# Altium PCB EZ_FPGA_Bridge.PcbDoc (part 1 of 2)
Units mil, origin at the board's own origin, x right, y up, seen from the top; angles counter-clockwise.
Board outline 3937 x 3150 mil, 2 copper layers (Top Layer, Bottom Layer); 28 components, 69 nets, 313 pads, 1452 vias.
Unrouted connection lines stored in the file: 1.
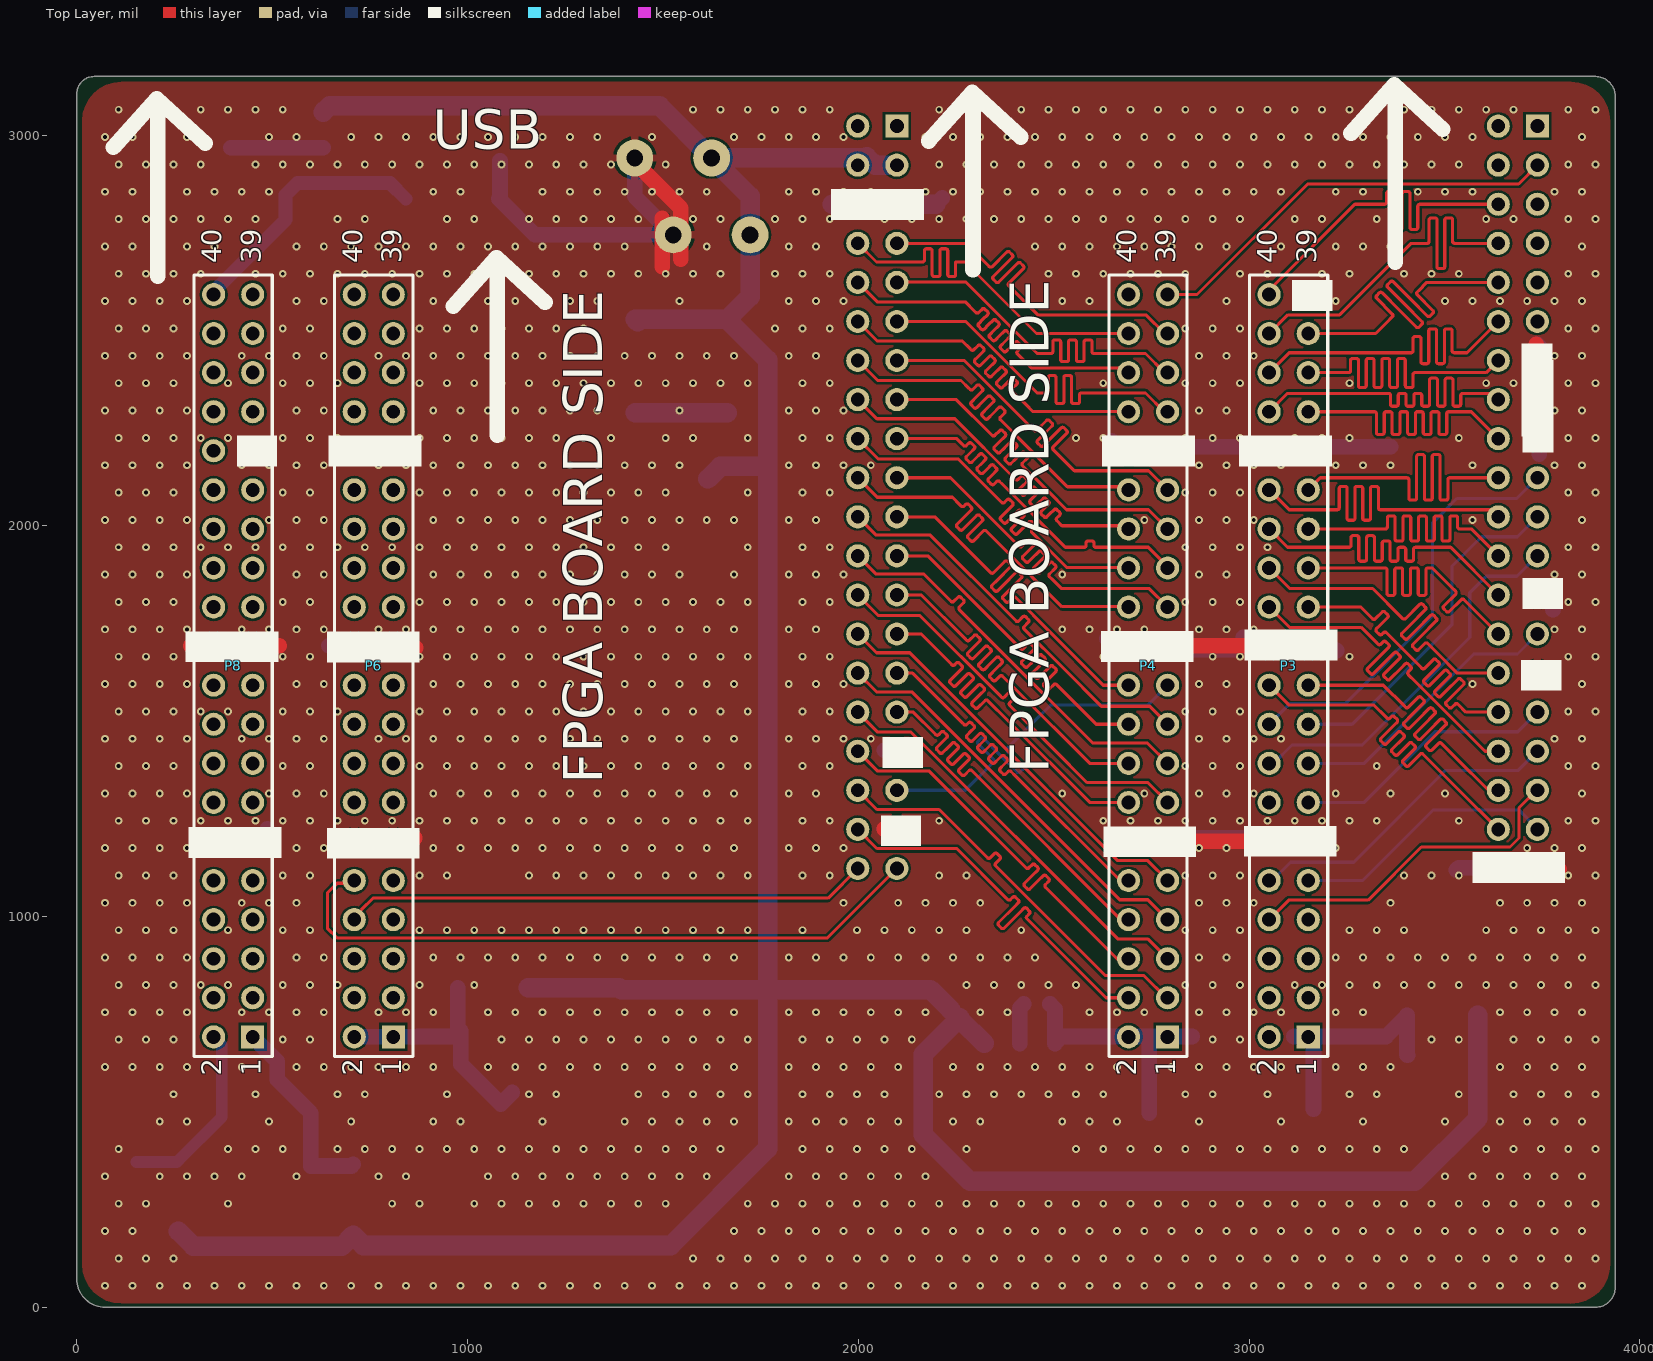
[diagram p0: Top Layer view]
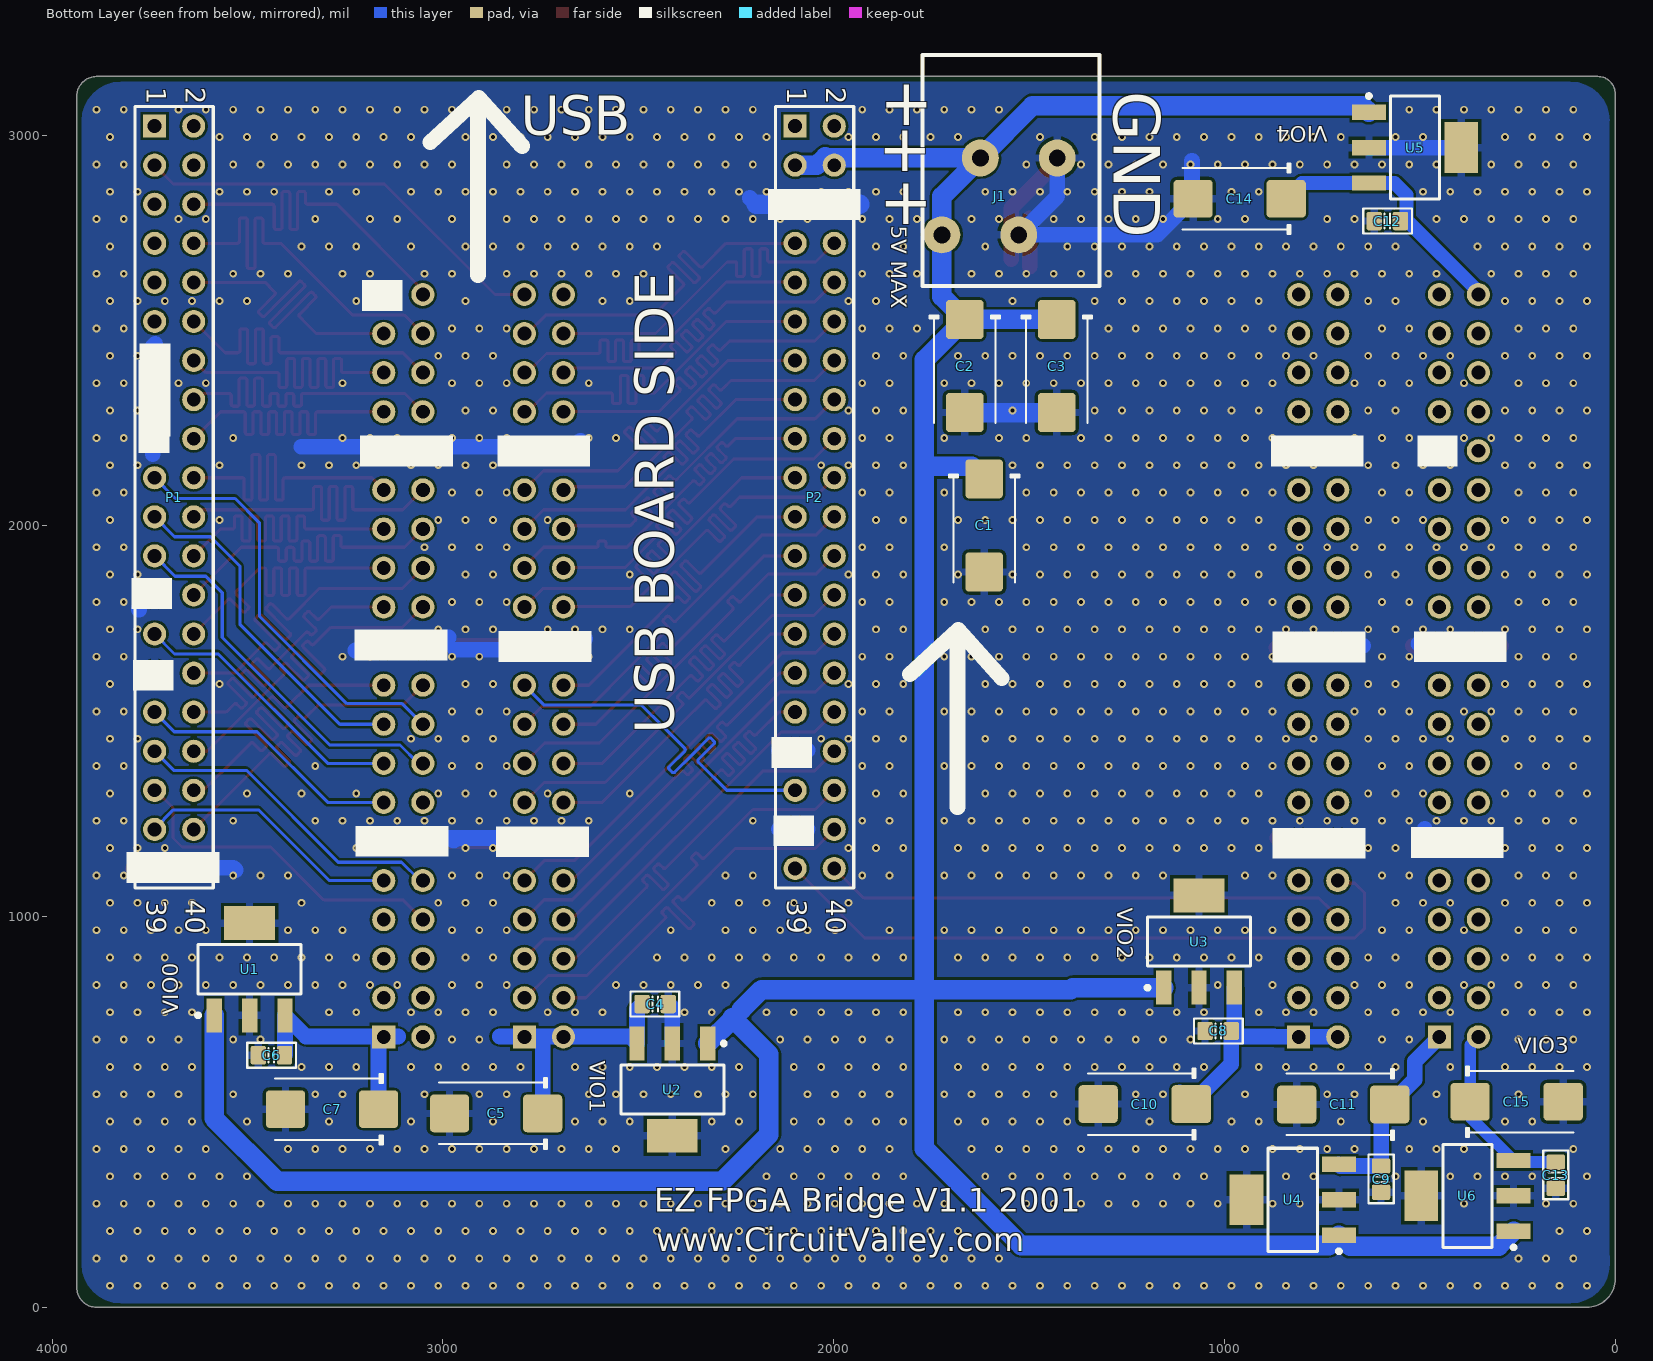
[diagram p1: Bottom Layer view, seen from below]
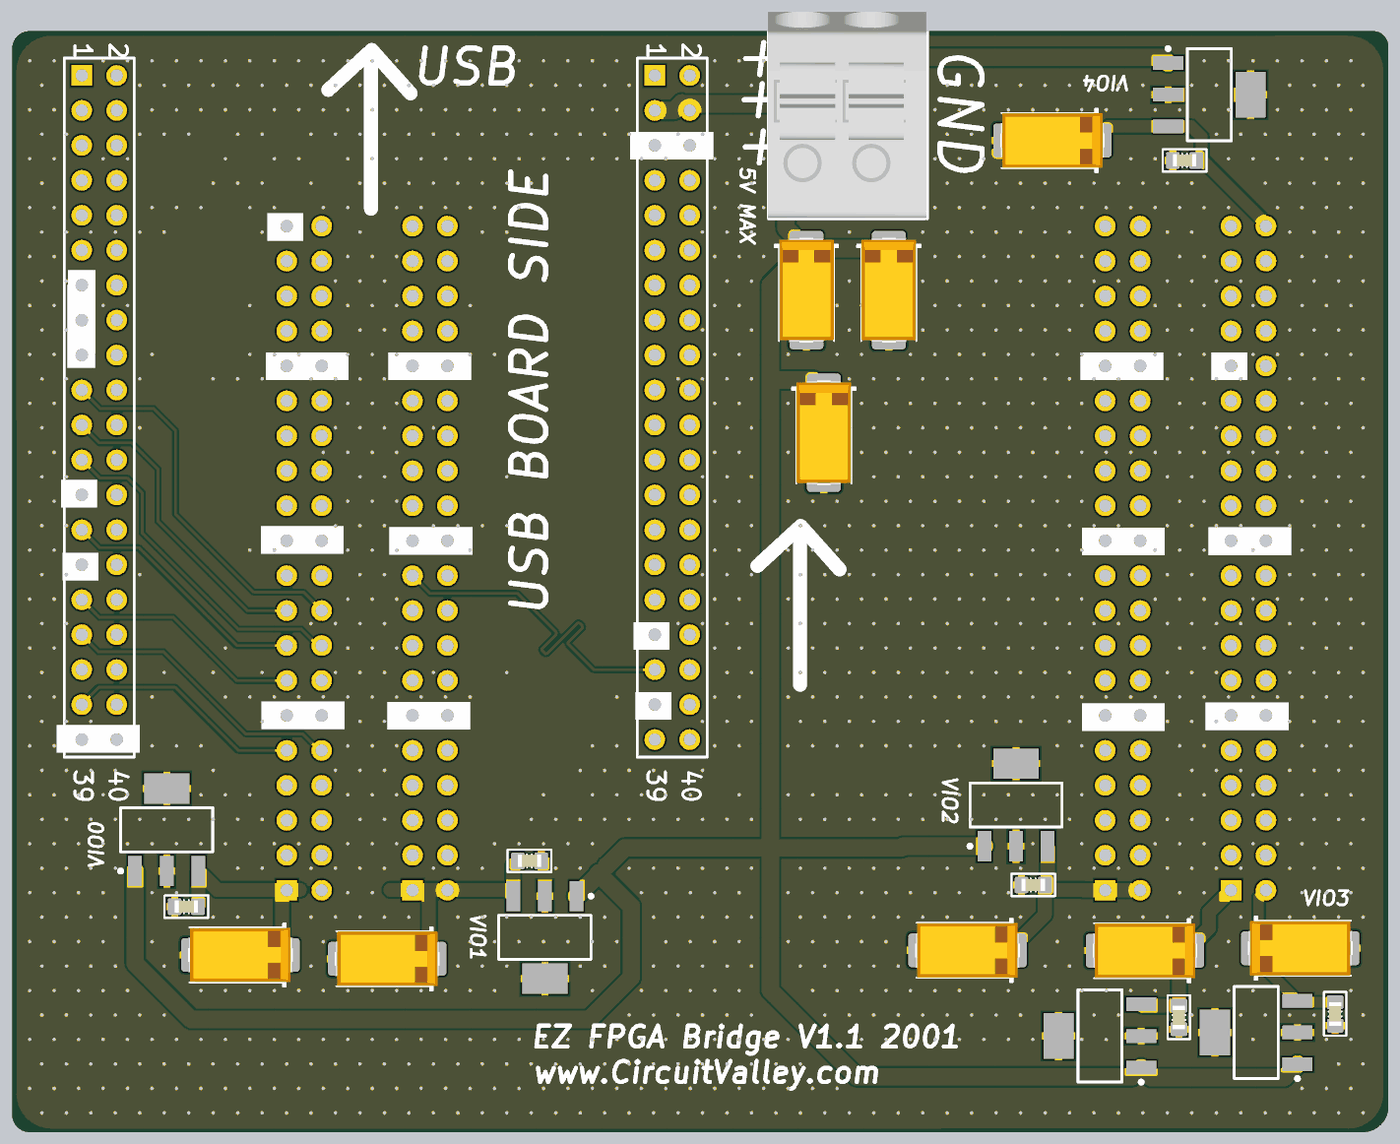
[diagram p3: 3D render of the assembled board from below, using the file's embedded part models]

## Layer stack, top to bottom
Top Solder: solder mask 0.4, Solder Resist, Dk 3.5
Top Layer: signal copper 1.4
Dielectric 1: dielectric 12.6, FR-4, Dk 4.8
Bottom Layer: signal copper 1.4
Bottom Solder: solder mask 0.4, Solder Resist, Dk 3.5

## Board outline
0,72 0,3106 cw(c44,3106) 44,3150 3887,3150 cw(c3887,3100) 3937,3100 3937,50 cw(c3887,50) 3887,0 72,0 cw(c72,72)

## Design rules (kind name [scope] priority, off if disabled: settings)
Clearance [All] p1: gap=6
MatchedLengths EZ_USB [InNetClass('EZ_USB')] p1: tolerance=2 checknetsindiffpair=TRUE checkdiffpairvsdiffpair=TRUE checkothers=TRUE
PolygonConnect [All] p1: connectstyle=Relief reliefconductorwidth=20 reliefentries=4 polygonreliefangle="90 Angle" airgapwidth=8
RoutingVias [All] p1: holewidth=11.81 width=24 viastyle="Through Hole" minholewidth=11.81 minwidth=24 maxholewidth=196.85 maxwidth=250
SolderMaskExpansion [All] p1: expansion=4
Width [All] p1: maxlimit=500 minlimit=6 preferedwidth=10
30 further rules are at their usual default settings.

## Classes and differential pairs
net class EZ_USB: CTL0 CTL1 CTL2 CTL3 CTL4_SW CTL5 CTL6 CTL7 CTL8 CTL9 CTL10 CTL11 CTL12 DQ0 DQ1 DQ2 DQ3 DQ4 DQ5 DQ6 DQ7 DQ8 DQ9 DQ10 DQ11 DQ12 DQ13 DQ14 DQ15 DQ16 DQ17 DQ18 DQ19 DQ20 DQ21 DQ22 DQ23 DQ24 DQ25 DQ26 DQ27 DQ28 DQ29 DQ30 DQ31 GPIO45 PCLK

## Components (designator, comment, footprint, x,y, rotation, side; value= is the part's Value field where it differs from the comment)
C1 "33uf 20V D" CAPMP7343X310N 1615,2001 r270 bottom
C2 "33uf 20V D" CAPMP7343X310N 1664.5,2409 r270 bottom
C3 "33uf 20V D" CAPMP7343X310N 1429,2409 r270 bottom
C4 "100n" CAPC1608N 2457,776 r0 bottom
C5 "33uf 20V D" CAPMP7343X310N 2864,496 r0 bottom
C6 "100n" CAPC1608N 3439,645 r180 bottom
C7 "33uf 20V D" CAPMP7343X310N 3284,507 r0 bottom
C8 "100n" CAPC1608N 1016,707 r180 bottom
C9 "100n" CAPC1608N 599,328 r90 bottom
C10 "33uf 20V D" CAPMP7343X310N 1204,520 r0 bottom
C11 "33uf 20V D" CAPMP7343X310N 696,519 r0 bottom
C12 "100n" CAPC1608N 583,2780 r180 bottom
C13 "100n" CAPC1608N 152,338 r90 bottom
C14 "33uf 20V D" CAPMP7343X310N 961,2837 r0 bottom
C15 "33uf 20V D" CAPMP7343X310N 252,526 r180 bottom
J1 "804-102" 804-102 1546,2910 r0 bottom
P1 "Header 20X2" HDR2X20 3738,3023 r270 bottom
P2 "Header 20X2" HDR2X20 2098.63,3023 r270 bottom
P3 "Header 20X2" HDR2X20 3151.57,692 r90 top
P4 "Header 20X2" HDR2X20 2791.73,692 r90 top
P6 "Header 20X2" HDR2X20 809.84,692 r90 top
P8 "Header 20X2" HDR2X20 450,692 r90 top
U1 "MCP1826ST-1802E/DB" SOT-223-DB3_N 3495,865 r90 bottom
U2 "MCP1826ST-1802E/DB" SOT-223-DB3_N 2413,557 r270 bottom
U3 "MCP1826ST-1802E/DB" SOT-223-DB3_N 1065,936 r90 bottom
U4 "MCP1826ST-1802E/DB" SOT-223-DB3_N 825,275 r0 bottom
U5 "MCP1826ST-1802E/DB" SOT-223-DB3_N 512,2968 r180 bottom
U6 "MCP1826ST-1802E/DB" SOT-223-DB3_N 378,285 r0 bottom

## Footprints (in the part's own frame and the unit in brackets; to place one, negate y for a bottom-side part, rotate by r counter-clockwise, add the part's x,y. Pads: shape width x height; smd on the part's side, far side on the other; paste and mask are expansions set on the pad)
804-102 [mm] "Wago"
  round 2.4 hole 1.1: 1(-3,-0.8) 1(-0.5,4.2) 2(2,-0.8) 2(4.5,4.2)
  silkscreen extent -5.75,-7.5 5.75,7.52, body extent -5.69,-7.51 5.81,7.49, height 14.41
CAPC1608N [mm] "Chip Capacitor, Body 1.6x0.8mm, 0603, IPC Medium Density"
  round 0.254 on Mech14: 0(0,0)
  rrect25% 1x1.2 smd: 1(-0.85,0) 2(0.85,0)
  Top Layer pour cut-out: -0.4,0.6 0.4,0.6 0.4,-0.6 -0.4,-0.6
  silkscreen extent -1.57,-0.81 1.6,0.81, body extent -0.85,-0.45 0.85,0.45, height 0.89
CAPMP7343X310N [mm] "Molded body capacitor, Body 7.3x4.3mm, 2917, IPC Nominal settings"
  round 1 on Mech14: 0(0,0)
  rrect20% 2.55x2.45 smd: 1(-3.025,0) 2(3.025,0)
  silkscreen extent -3.3,-2.3 3.7,2.3, body extent -3.8,-1.97 3.8,1.98, height 3.1
HDR2X20 [mm] "Connector; Header; 20x2 Position"
  rect 1.5x1.5 hole 0.9: 1(0,0)
  round 1.5 hole 0.9: 2(0,2.54) 3(2.54,0) 4(2.54,2.54) 5(5.08,0) 6(5.08,2.54) 7(7.62,0) 8(7.62,2.54) 9(10.16,0) 10(10.16,2.54) 11(12.7,0) 12(12.7,2.54) 13(15.24,0) 14(15.24,2.54) 15(17.78,0) 16(17.78,2.54) 17(20.32,0) 18(20.32,2.54) 19(22.86,0) 20(22.86,2.54) 21(25.4,0) 22(25.4,2.54) 23(27.94,0) 24(27.94,2.54) 25(30.48,0) 26(30.48,2.54) 27(33.02,0) 28(33.02,2.54) 29(35.56,0) 30(35.56,2.54) 31(38.1,0) 32(38.1,2.54) 33(40.64,0) 34(40.64,2.54) 35(43.18,0) 36(43.18,2.54) 37(45.72,0) 38(45.72,2.54) 39(48.26,0) 40(48.26,2.54)
  silkscreen extent -1.27,-1.27 49.53,3.81
SOT-223-DB3_N [mm] "SOT223, 4-Leads, Body 6.5x3.5mm, Pitch 2.3mm, Lead Span 7mm, IPC Medium Density"
  rect 2.2x1 smd: 1(-3,2.3) 2(-3,0) 3(-3,-2.3)
  rect 2.2x3.3 smd: 4(3,0)
  silkscreen extent -3.12,-3.35 1.6,3.48, body extent -1.85,-3.35 1.85,3.35, height 1.8

## Part data
C1 C2 C3 C5 C7 C10 C11 C14 C15: library part CAPT_330u_2917_6V3, "Capacitor SMD Tant 330uF 20% 6V3 2917"
C4 C6 C8 C9 C12 C13: library part CAPC_10p_0603_NP0_1%_50V, "Capacitor SMD Cer 10pF 5% 50V NP0 0603"
P1 P2 P3 P4 P6 P8: "Header, 20-Pin, Dual row"
U1 U2 U3 U4 U5 U6: "1000 mA, Low Voltage, Low Quiescent Current LDO Regulator, 3-Pin SOT-223, Extended Temperature, Tape and Reel"

## Via types
v1: diameter 20, hole 10, Top Layer to Bottom Layer, tented both sides, 1452 vias

## Nets (pads, with @x,y where several pads share a name; then routed paths per layer and width w, separated by ;. In a path a pad name is that pad's centre, name@x,y a point inside that pad or via, vN(x,y) a via of type N, cw(c..) or ccw(c..) an arc to the next point about the centre after c; other vN are vias at no path point)
CTL0: P2.31 P4.8 | length 1054.5
  Top Layer w8: P2.31@2098.63,1523 2141,1523 2195,1469 2198.54,1465.46 ccw(c2202.07,1469) 2205.61,1465.46 2212.28,1472.14 cw(c2215.82,1468.6) 2219.35,1472.14 2226.42,1465.07 cw(c2222.89,1461.53) 2226.42,1458 2216.21,1447.79 2201.5,1433.08 ccw(c2205.04,1429.54) 2201.5,1426.01 2208.57,1418.93 ccw(c2212.11,1422.47) 2215.64,1418.93 2230.36,1433.64 2240.57,1443.86 cw(c2244.1,1440.32) 2247.64,1443.86 2254.71,1436.78 cw(c2251.17,1433.25) 2254.71,1429.71 2244.5,1419.5 2229.79,1404.79 ccw(c2233.32,1401.26) 2229.79,1397.72 2236.86,1390.65 ccw(c2240.39,1394.18) 2243.93,1390.65 2258.64,1405.36 2268.85,1415.57 cw(c2272.39,1412.04) 2275.92,1415.57 2282.99,1408.5 cw(c2279.46,1404.96) 2282.99,1401.43 2272.78,1391.22 2258.07,1376.51 ccw(c2261.61,1372.97) 2258.07,1369.44 2265.14,1362.36 ccw(c2268.68,1365.9) 2272.21,1362.36 2283.39,1373.54 cw(c2286.92,1370) 2290.46,1373.54 2306.5,1357.5 2672,992 P4.8@2691.73,992
CTL1: P2.29 P4.10 | length 1054.5
  Top Layer w8: P2.29@2098.63,1623 2139,1623 2267,1495 2270.54,1491.46 ccw(c2274.07,1495) 2277.61,1491.46 2281.85,1495.71 cw(c2285.38,1492.17) 2288.92,1495.71 2295.99,1488.64 cw(c2292.46,1485.1) 2295.99,1481.56 2288.21,1473.79 2278.31,1463.88 ccw(c2281.84,1460.35) 2278.31,1456.81 2285.38,1449.74 ccw(c2288.92,1453.28) 2292.45,1449.74 2302.36,1459.64 2310.13,1467.42 cw(c2313.67,1463.89) 2317.2,1467.42 2324.28,1460.35 cw(c2320.74,1456.82) 2324.28,1453.28 2316.5,1445.5 2306.59,1435.6 ccw(c2310.13,1432.06) 2306.59,1428.53 2313.66,1421.46 ccw(c2317.2,1424.99) 2320.74,1421.46 2330.64,1431.36 2338.42,1439.14 cw(c2341.95,1435.6) 2345.49,1439.14 2352.56,1432.07 cw(c2349.02,1428.53) 2352.56,1425 2344.78,1417.22 2334.88,1407.31 ccw(c2338.41,1403.78) 2334.88,1400.24 2341.95,1393.17 ccw(c2345.48,1396.71) 2349.02,1393.17 2358.92,1403.08 2366.7,1410.85 cw(c2370.24,1407.32) 2373.77,1410.85 2380.84,1403.78 cw(c2377.31,1400.25) 2380.84,1396.71 2373.07,1388.93 2363.16,1379.03 ccw(c2366.7,1375.49) 2363.16,1371.96 2370.23,1364.89 ccw(c2373.77,1368.42) 2377.3,1364.89 2383.67,1371.26 cw(c2387.21,1367.72) 2390.74,1371.26 2401.5,1360.5 2670,1092 P4.10@2691.73,1092
CTL2: P2.27 P4.14 | length 1054.5
  Top Layer w8: P2.27@2098.63,1723 2161,1723 2236,1648 2239.54,1644.46 ccw(c2243.07,1648) 2246.61,1644.46 2250.85,1648.71 cw(c2254.38,1645.17) 2257.92,1648.71 2264.99,1641.64 cw(c2261.46,1638.1) 2264.99,1634.57 2257.21,1626.79 2235.19,1604.76 ccw(c2238.72,1601.23) 2235.19,1597.69 2242.26,1590.62 ccw(c2245.79,1594.16) 2249.33,1590.62 2271.36,1612.64 2279.13,1620.42 cw(c2282.67,1616.89) 2286.2,1620.42 2293.28,1613.35 cw(c2289.74,1609.82) 2293.28,1606.28 2285.5,1598.5 2263.47,1576.48 ccw(c2267.01,1572.94) 2263.47,1569.41 2270.54,1562.34 ccw(c2274.08,1565.87) 2277.61,1562.34 2299.64,1584.36 2307.42,1592.14 cw(c2310.95,1588.6) 2314.49,1592.14 2321.56,1585.07 cw(c2318.02,1581.53) 2321.56,1578 2313.78,1570.22 2291.76,1548.19 ccw(c2295.29,1544.66) 2291.76,1541.12 2298.83,1534.05 ccw(c2302.36,1537.59) 2305.9,1534.05 2324.39,1552.54 cw(c2327.92,1549) 2331.46,1552.54 2382,1502 2592,1292 P4.14@2691.73,1292
CTL3: P2.25 P4.16 | length 1054.5
  Top Layer w8: P2.25@2098.63,1823 2161,1823 2273.5,1710.5 2277.04,1706.96 ccw(c2280.57,1710.5) 2284.11,1706.96 2296.47,1719.33 cw(c2300.01,1715.8) 2303.54,1719.33 2310.61,1712.26 cw(c2307.08,1708.72) 2310.61,1705.19 2294.71,1689.29 2280.81,1675.39 ccw(c2284.35,1671.85) 2280.81,1668.31 2287.88,1661.24 ccw(c2291.42,1664.78) 2294.95,1661.24 2308.86,1675.14 2324.76,1691.05 cw(c2328.29,1687.51) 2331.83,1691.05 2338.9,1683.98 cw(c2335.36,1680.44) 2338.9,1676.9 2323,1661 2309.1,1647.1 ccw(c2312.63,1643.57) 2309.1,1640.03 2316.17,1632.96 ccw(c2319.7,1636.49) 2323.24,1632.96 2337.14,1646.86 2353.04,1662.76 cw(c2356.58,1659.23) 2360.11,1662.76 2367.18,1655.69 cw(c2363.65,1652.16) 2367.18,1648.62 2351.28,1632.72 2337.38,1618.82 ccw(c2340.92,1615.28) 2337.38,1611.75 2344.45,1604.67 ccw(c2347.99,1608.21) 2351.52,1604.67 2361.89,1615.04 cw(c2365.42,1611.5) 2368.96,1615.04 2403,1581 2592,1392 P4.16@2691.73,1392
CTL4_SW: P2.23 P4.18 | length 1054.5
  Top Layer w8: P2.23@2098.63,1923 2178,1923 2412,1689 2415.54,1685.46 ccw(c2419.07,1689) 2422.61,1685.46 2434.47,1697.33 cw(c2438.01,1693.79) 2441.54,1697.33 2448.61,1690.26 cw(c2445.08,1686.72) 2448.61,1683.19 2433.21,1667.79 2418.81,1653.39 ccw(c2422.35,1649.85) 2418.81,1646.31 2425.88,1639.24 ccw(c2429.42,1642.78) 2432.95,1639.24 2447.36,1653.64 2462.76,1669.05 cw(c2466.29,1665.51) 2469.83,1669.05 2476.9,1661.98 cw(c2473.36,1658.44) 2476.9,1654.9 2461.5,1639.5 2447.1,1625.1 ccw(c2450.63,1621.57) 2447.1,1618.03 2454.17,1610.96 ccw(c2457.7,1614.49) 2461.24,1610.96 2475.64,1625.36 2491.04,1640.76 cw(c2494.58,1637.23) 2498.11,1640.76 2505.18,1633.69 cw(c2501.65,1630.16) 2505.18,1626.62 2489.78,1611.22 2475.38,1596.82 ccw(c2478.92,1593.28) 2475.38,1589.75 2482.45,1582.67 ccw(c2485.99,1586.21) 2489.52,1582.67 2500.39,1593.54 cw(c2503.92,1590) 2507.46,1593.54 2540,1561 2609,1492 P4.18@2691.73,1492
CTL5: P2.21 P4.20 | length 1054.5
  Top Layer w8: P2.21@2098.63,2023 2196,2023 2335.5,1883.5 2339.04,1879.96 ccw(c2342.57,1883.5) 2346.11,1879.96 2374.93,1908.79 cw(c2378.47,1905.25) 2382,1908.79 2389.07,1901.72 cw(c2385.54,1898.18) 2389.07,1894.65 2356.71,1862.29 2342.35,1847.93 ccw(c2345.89,1844.39) 2342.35,1840.85 2349.42,1833.78 ccw(c2352.96,1837.32) 2356.49,1833.78 2370.86,1848.14 2403.22,1880.51 cw(c2406.75,1876.97) 2410.29,1880.51 2417.36,1873.43 cw(c2413.82,1869.9) 2417.36,1866.36 2385,1834 2370.64,1819.64 ccw(c2374.17,1816.11) 2370.64,1812.57 2377.71,1805.5 ccw(c2381.24,1809.03) 2384.78,1805.5 2395.6,1816.32 cw(c2399.14,1812.79) 2402.68,1816.32 2493,1726 2627,1592 P4.20@2691.73,1592
CTL6: P2.19 P4.23 | length 1054.5
  Top Layer w8: P2.19@2098.63,2123 2236,2123 2408,1951 2411.54,1947.46 ccw(c2415.07,1951) 2418.61,1947.46 2433.46,1962.32 cw(c2436.99,1958.78) 2440.53,1962.32 2447.6,1955.24 cw(c2444.06,1951.71) 2447.6,1948.17 2429.21,1929.79 2421.44,1922.01 ccw(c2424.97,1918.47) 2421.44,1914.94 2428.51,1907.87 ccw(c2432.04,1911.4) 2435.58,1907.87 2443.36,1915.64 2461.74,1934.03 cw(c2465.28,1930.5) 2468.81,1934.03 2475.88,1926.96 cw(c2472.35,1923.42) 2475.88,1919.89 2457.5,1901.5 2449.72,1893.72 ccw(c2453.25,1890.19) 2449.72,1886.65 2456.79,1879.58 ccw(c2460.33,1883.12) 2463.86,1879.58 2471.64,1887.36 2490.03,1905.75 cw(c2493.56,1902.21) 2497.1,1905.75 2504.17,1898.68 cw(c2500.63,1895.14) 2504.17,1891.61 2489.32,1876.75 ccw(c2492.85,1873.22) 2489.32,1869.68 2498.5,1860.5 2519,1840 2743.73,1840 P4.23@2791.73,1792
CTL7: P2.17 P4.25 | length 1054.5
  Top Layer w8: P2.17@2098.63,2223 2252,2223 2266,2209 2269.54,2205.46 ccw(c2273.07,2209) 2276.61,2205.46 2282.53,2211.39 cw(c2286.06,2207.85) 2289.6,2211.39 2296.67,2204.32 cw(c2293.14,2200.78) 2296.67,2197.24 2287.21,2187.79 2276.76,2177.33 ccw(c2280.29,2173.79) 2276.76,2170.26 2283.83,2163.19 ccw(c2287.36,2166.72) 2290.9,2163.19 2301.36,2173.64 2310.81,2183.1 cw(c2314.35,2179.57) 2317.88,2183.1 2324.96,2176.03 cw(c2321.42,2172.5) 2324.96,2168.96 2315.5,2159.5 2305.04,2149.05 ccw(c2308.58,2145.51) 2305.04,2141.97 2312.11,2134.9 ccw(c2315.65,2138.44) 2319.18,2134.9 2329.64,2145.36 2339.1,2154.82 cw(c2342.63,2151.28) 2346.17,2154.82 2353.24,2147.75 cw(c2349.7,2144.21) 2353.24,2140.68 2343.78,2131.22 2333.32,2120.76 ccw(c2336.86,2117.23) 2333.32,2113.69 2340.4,2106.62 ccw(c2343.93,2110.15) 2347.47,2106.62 2354.39,2113.54 cw(c2357.92,2110) 2361.46,2113.54 2369,2106 2530,1945 2573,1945 2578,1945 ccw(c2578,1950) 2583,1950 2583,1956 cw(c2588,1956) 2588,1961 2598,1961 cw(c2598,1956) 2603,1956 2603,1950 ccw(c2608,1950) 2608,1945 2619,1945 2742,1945 2791.73,1895.27 P4.25@2791.73,1892
CTL8: P2.15 P4.27 | length 1054.5
  Top Layer w8: P2.15@2098.63,2323 2251,2323 2339,2235 2342.54,2231.46 ccw(c2346.07,2235) 2349.61,2231.46 2361.81,2243.67 cw(c2365.35,2240.14) 2368.89,2243.67 2375.96,2236.6 cw(c2372.42,2233.07) 2375.96,2229.53 2360.21,2213.79 2348.47,2202.04 ccw(c2352.01,2198.51) 2348.47,2194.97 2355.54,2187.9 ccw(c2359.08,2191.44) 2362.61,2187.9 2374.36,2199.64 2390.1,2215.39 cw(c2393.63,2211.85) 2397.17,2215.39 2404.24,2208.32 cw(c2400.71,2204.78) 2404.24,2201.25 2388.5,2185.5 2376.75,2173.76 ccw(c2380.29,2170.22) 2376.75,2166.69 2383.82,2159.62 ccw(c2387.36,2163.15) 2390.9,2159.62 2402.64,2171.36 2418.38,2187.1 cw(c2421.92,2183.57) 2425.45,2187.1 2432.53,2180.03 ; 2432.53,2172.96 2420.32,2160.75 ccw(c2423.85,2157.22) 2420.32,2153.68 2486,2088 2533,2041 2742.73,2041 P4.27@2791.73,1992 ; 2432.53,2172.96 ccw(c2428.99,2176.5) 2432.53,2180.03
CTL9: P2.13 P4.29 | length 1054.5
  Top Layer w8: P2.13@2098.63,2423 2271,2423 2446,2248 2449.54,2244.46 ccw(c2453.07,2248) 2456.61,2244.46 2481.72,2269.58 cw(c2485.25,2266.04) 2488.79,2269.58 2495.86,2262.5 cw(c2492.32,2258.97) 2495.86,2255.43 2467.21,2226.79 2459.11,2218.68 ccw(c2462.64,2215.15) 2459.11,2211.61 2466.18,2204.54 ccw(c2469.71,2208.08) 2473.25,2204.54 2481.36,2212.64 2519.36,2250.65 cw(c2522.89,2247.11) 2526.43,2250.65 2533.5,2243.57 cw(c2529.96,2240.04) 2533.5,2236.5 2499.03,2202.04 ccw(c2502.57,2198.5) 2499.03,2194.97 2553,2141 2742.73,2141 P4.29@2791.73,2092
CTL10: P2.11 P4.33 | length 1054.5
  Top Layer w8: P2.11@2097.63,2523 2275,2523 2458,2340 2476,2340 2481,2340 ccw(c2481,2345) 2486,2345 2486,2379.39 cw(c2491,2379.39) 2491,2384.39 2501,2384.39 cw(c2501,2379.39) 2506,2379.39 2506,2340 2506,2317.61 ccw(c2511,2317.61) 2511,2312.61 2521,2312.61 ccw(c2521,2317.61) 2526,2317.61 2526,2340 2526,2379.39 cw(c2531,2379.39) 2531,2384.39 2541,2384.39 cw(c2541,2379.39) 2546,2379.39 2546,2340 2546,2317.61 ccw(c2551,2317.61) 2551,2312.61 2561,2312.61 ccw(c2561,2317.61) 2566,2317.61 2566,2335 cw(c2571,2335) 2571,2340 2607,2340 2735,2340 2783,2292 P4.33@2790.73,2292
CTL11: P2.9 P4.35 | length 1054.5
  Top Layer w8: P2.9@2097.63,2624 2275,2624 2458,2441 2488,2441 2493,2441 ccw(c2493,2446) 2498,2446 2498,2470.74 cw(c2503,2470.74) 2503,2475.74 2513,2475.74 cw(c2513,2470.74) 2518,2470.74 2518,2441 2518,2425.26 ccw(c2523,2425.26) 2523,2420.26 2533,2420.26 ccw(c2533,2425.26) 2538,2425.26 2538,2441 2538,2470.74 cw(c2543,2470.74) 2543,2475.74 2553,2475.74 cw(c2553,2470.74) 2558,2470.74 2558,2441 2558,2425.26 ccw(c2563,2425.26) 2563,2420.26 2573,2420.26 ccw(c2573,2425.26) 2578,2425.26 2578,2441 2578,2470.74 cw(c2583,2470.74) 2583,2475.74 2593,2475.74 cw(c2593,2470.74) 2598,2470.74 2598,2446 ccw(c2603,2446) 2603,2441 2628,2441 2735,2441 2783,2393 P4.35@2790.73,2393
CTL12: P2.7 P4.37 | length 1054.5
  Top Layer w8: P2.7@2098.63,2723 2276,2723 2332,2667 2335.54,2663.46 ccw(c2339.07,2667) 2342.61,2663.46 2379.88,2700.74 cw(c2383.42,2697.2) 2386.95,2700.74 2394.02,2693.67 cw(c2390.49,2690.13) 2394.02,2686.6 2353.21,2645.79 2345.43,2638.01 ccw(c2348.97,2634.47) 2345.44,2630.94 2352.51,2623.87 ccw(c2356.04,2627.4) 2359.58,2623.87 2367.36,2631.64 2408.17,2672.45 cw(c2411.7,2668.92) 2415.24,2672.45 2422.31,2665.38 cw(c2418.77,2661.85) 2422.31,2658.31 2385.03,2621.04 ccw(c2388.57,2617.5) 2385.03,2613.97 2436,2563 2459,2540 2736,2540 2784,2492 P4.37@2791.73,2492
DQ0: P2.38 P4.4 | length 1054.5
  Top Layer w8: P2.38@1998.63,1223 2047.63,1174 2252,1174 2379,1047 2382.54,1043.46 ccw(c2386.07,1047) 2389.61,1043.46 2395.4,1049.26 cw(c2398.94,1045.72) 2402.47,1049.26 2409.54,1042.19 cw(c2406.01,1038.65) 2409.54,1035.12 2400.21,1025.79 2358.99,984.56 ccw(c2362.52,981.02) 2358.99,977.49 2366.06,970.42 ccw(c2369.59,973.95) 2373.13,970.42 2414.36,1011.64 2423.69,1020.98 cw(c2427.22,1017.44) 2430.76,1020.98 2437.83,1013.9 cw(c2434.29,1010.37) 2437.83,1006.83 2431,1000 ccw(c2433.5,997.5) 2431,995 2634,792 P4.4@2691.73,792
DQ1: P2.36 P4.3 | length 1054.5
  Top Layer w8: P2.36@1998.63,1323 2047.63,1274 2207,1274 2327,1154 2330.54,1150.46 ccw(c2334.07,1154) 2337.61,1150.46 2348.22,1161.07 cw(c2351.75,1157.54) 2355.29,1161.07 2362.36,1154 cw(c2358.82,1150.47) 2362.36,1146.93 2351.75,1136.32 ccw(c2355.28,1132.79) 2351.75,1129.25 2364,1117 2632,849 2731,849 2788,792 P4.3@2791.73,792
DQ2: P2.34 P4.6 | length 1054.5
  Top Layer w8: P2.34@1998.63,1423 2049.63,1372 2182,1372 2426,1128 2429.54,1124.46 ccw(c2433.07,1128) 2436.61,1124.46 2444.89,1132.75 cw(c2448.43,1129.21) 2451.96,1132.75 2459.03,1125.68 cw(c2455.5,1122.14) 2459.03,1118.61 2447.21,1106.79 2425.39,1084.97 ccw(c2428.93,1081.43) 2425.39,1077.89 2432.46,1070.82 ccw(c2436,1074.36) 2439.53,1070.82 2461.36,1092.64 2473.18,1104.47 cw(c2476.71,1100.93) 2480.25,1104.47 2487.32,1097.4 cw(c2483.78,1093.86) 2487.32,1090.32 2479.03,1082.04 ccw(c2482.57,1078.5) 2479.03,1074.97 2517,1037 2662,892 P4.6@2691.73,892
DQ3: P2.32 P4.5 | length 1054.5
  Top Layer w8: P2.32@1998.63,1523 2049.63,1472 2135,1472 2665,942 2741.73,942 P4.5@2791.73,892
DQ4: P2.30 P4.7 | length 1054.5
  Top Layer w8: P2.30@1998.63,1623 2046.63,1575 2137,1575 2669,1043 2740.73,1043 P4.7@2791.73,992
DQ5: P2.28 P4.9 | length 1054.5
  Top Layer w8: P2.28@1998.63,1723 2046.63,1675 2132,1675 2664,1143 2740.73,1143 P4.9@2791.73,1092
DQ6: P2.26 P4.13 | length 1054.5
  Top Layer w8: P2.26@1998.63,1823 2051.63,1770 2158,1770 2363,1565 2366.54,1561.46 ccw(c2370.07,1565) 2373.61,1561.46 2384.22,1572.07 cw(c2387.75,1568.54) 2391.29,1572.07 2398.36,1565 cw(c2394.82,1561.47) 2398.36,1557.93 2387.75,1547.32 ccw(c2391.28,1543.79) 2387.75,1540.25 2498.5,1429.5 2585,1343 2740.73,1343 P4.13@2791.73,1292
DQ7: P2.24 P4.15 | length 1054.5
  Top Layer w8: P2.24@1998.63,1923 2044.63,1877 2167,1877 2234,1810 2237.54,1806.46 ccw(c2241.07,1810) 2244.61,1806.46 2255.22,1817.07 cw(c2258.75,1813.54) 2262.29,1817.07 2269.36,1810 cw(c2265.82,1806.47) 2269.36,1802.93 2258.75,1792.32 ccw(c2262.28,1788.79) 2258.75,1785.25 2367.5,1676.5 2600,1444 2739.73,1444 P4.15@2791.73,1392
DQ8: P2.22 P4.17 | length 1054.5
  Top Layer w8: P2.22@1998.63,2023 2045.63,1976 2184,1976 2400,1760 2403.54,1756.46 ccw(c2407.07,1760) 2410.61,1756.46 2421.22,1767.07 cw(c2424.75,1763.54) 2428.29,1767.07 2435.36,1760 cw(c2431.82,1756.47) 2435.36,1752.93 2424.75,1742.32 ccw(c2428.28,1738.79) 2424.75,1735.25 2525,1635 2622,1538 2745.73,1538 P4.17@2791.73,1492
DQ9: P2.20 P4.24 | length 1054.5
  Top Layer w8: P2.20@1998.63,2123 2048.63,2073 2241,2073 2260,2054 2263.54,2050.46 ccw(c2267.07,2054) 2270.61,2050.46 2274.85,2054.71 cw(c2278.38,2051.17) 2281.92,2054.71 2288.99,2047.64 cw(c2285.46,2044.1) 2288.99,2040.56 2281.21,2032.79 2252.62,2004.2 ccw(c2256.16,2000.66) 2252.62,1997.13 2259.69,1990.06 ccw(c2263.23,1993.59) 2266.77,1990.06 2295.36,2018.64 2303.13,2026.42 cw(c2306.67,2022.89) 2310.2,2026.42 2317.28,2019.35 cw(c2313.74,2015.82) 2317.28,2012.28 2309.5,2004.5 2280.91,1975.91 ccw(c2284.44,1972.38) 2280.91,1968.84 2287.98,1961.77 ccw(c2291.51,1965.31) 2295.05,1961.77 2320.1,1986.82 cw(c2323.64,1983.29) 2327.18,1986.82 2367,1947 2521,1793 2690.73,1793 P4.24@2691.73,1792
DQ10: P2.18 P4.26 | length 1054.5
  Top Layer w8: P2.18@1998.63,2223 2050.63,2171 2256,2171 2363.5,2063.5 2367.04,2059.96 ccw(c2370.57,2063.5) 2374.11,2059.96 2380.71,2066.57 cw(c2384.25,2063.04) 2387.79,2066.57 2394.86,2059.5 cw(c2391.32,2055.97) 2394.86,2052.43 2384.71,2042.29 2364.57,2022.14 ccw(c2368.11,2018.61) 2364.57,2015.07 2371.64,2008 ccw(c2375.18,2011.54) 2378.71,2008 2398.86,2028.14 2409,2038.29 cw(c2412.53,2034.75) 2416.07,2038.29 2423.14,2031.22 cw(c2419.61,2027.68) 2423.14,2024.15 2413,2014 2392.85,1993.86 ccw(c2396.39,1990.32) 2392.85,1986.79 2399.93,1979.72 ccw(c2403.46,1983.25) 2407,1979.72 2427.14,1999.86 2437.28,2010 cw(c2440.82,2006.47) 2444.35,2010 2451.43,2002.93 cw(c2447.89,1999.4) 2451.43,1995.86 2444.82,1989.25 ccw(c2448.35,1985.72) 2444.82,1982.18 2528.5,1898.5 2534,1893 2690.73,1893 P4.26@2691.73,1892
DQ11: P2.16 P4.28 | length 1054.5
  Top Layer w8: P2.16@1998.63,2323 2047.63,2274 2247,2274 2398.5,2122.5 2402.04,2118.96 ccw(c2405.57,2122.5) 2409.11,2118.96 2416.41,2126.27 cw(c2419.94,2122.73) 2423.48,2126.27 2430.55,2119.19 cw(c2427.01,2115.66) 2430.55,2112.12 2419.71,2101.29 2411.94,2093.51 ccw(c2415.47,2089.97) 2411.94,2086.44 2419.01,2079.37 ccw(c2422.54,2082.9) 2426.08,2079.37 2433.86,2087.14 2444.69,2097.98 cw(c2448.23,2094.45) 2451.76,2097.98 2458.83,2090.91 cw(c2455.3,2087.37) 2458.83,2083.84 2448,2073 2440.22,2065.22 ccw(c2443.75,2061.69) 2440.22,2058.15 2447.29,2051.08 ccw(c2450.83,2054.62) 2454.36,2051.08 2462.14,2058.86 2472.98,2069.7 cw(c2476.51,2066.16) 2480.05,2069.7 2487.12,2062.63 cw(c2483.58,2059.09) 2487.12,2055.55 2476.28,2044.72 2468.5,2036.94 ccw(c2472.04,2033.4) 2468.5,2029.87 2475.57,2022.8 ccw(c2479.11,2026.33) 2482.65,2022.8 2490.42,2030.58 2501.26,2041.41 cw(c2504.8,2037.88) 2508.33,2041.41 2515.4,2034.34 cw(c2511.87,2030.81) 2515.4,2027.27 2508.1,2019.97 ccw(c2511.64,2016.43) 2508.1,2012.9 2508.5,2012.5 2521,2000 2683.73,2000 P4.28@2691.73,1992
DQ12: P2.14 P4.30 | length 1054.5
  Top Layer w8: P2.14@1998.63,2423 2049.63,2372 2263,2372 2282.5,2352.5 2286.04,2348.96 ccw(c2289.57,2352.5) 2293.11,2348.96 2303.31,2359.17 cw(c2306.85,2355.64) 2310.39,2359.17 2317.46,2352.1 cw(c2313.92,2348.57) 2317.46,2345.03 2303.71,2331.29 2288.97,2316.54 ccw(c2292.51,2313.01) 2288.97,2309.47 2296.04,2302.4 ccw(c2299.58,2305.94) 2303.11,2302.4 2317.86,2317.14 2331.6,2330.89 cw(c2335.13,2327.35) 2338.67,2330.89 2345.74,2323.82 cw(c2342.21,2320.28) 2345.74,2316.75 2332,2303 2317.25,2288.26 ccw(c2320.79,2284.72) 2317.25,2281.19 2324.33,2274.12 ccw(c2327.86,2277.65) 2331.4,2274.12 2346.14,2288.86 2359.88,2302.6 cw(c2363.42,2299.07) 2366.95,2302.6 2374.03,2295.53 cw(c2370.49,2292) 2374.03,2288.46 2363.82,2278.25 ccw(c2367.35,2274.72) 2363.82,2271.18 2426,2209 2535,2100 2683.73,2100 P4.30@2691.73,2092
DQ13: P2.12 P4.34 | length 1054.5
  Top Layer w8: P2.12@1998.63,2523 2048.63,2473 2266,2473 2285,2454 2288.54,2450.46 ccw(c2292.07,2454) 2295.61,2450.46 2306.57,2461.43 cw(c2310.1,2457.89) 2313.64,2461.43 2320.71,2454.36 cw(c2317.18,2450.82) 2320.71,2447.28 2306.21,2432.79 2298.44,2425.01 ccw(c2301.97,2421.47) 2298.44,2417.94 2305.51,2410.87 ccw(c2309.04,2414.4) 2312.58,2410.87 2320.36,2418.64 2334.85,2433.14 cw(c2338.39,2429.61) 2341.92,2433.14 2349,2426.07 cw(c2345.46,2422.54) 2349,2419 2334.5,2404.5 2326.72,2396.72 ccw(c2330.25,2393.19) 2326.72,2389.65 2333.79,2382.58 ccw(c2337.33,2386.12) 2340.86,2382.58 2348.64,2390.36 2363.14,2404.86 cw(c2366.67,2401.32) 2370.21,2404.86 2377.28,2397.79 cw(c2373.74,2394.25) 2377.28,2390.72 2362.78,2376.22 2355,2368.44 ccw(c2358.54,2364.9) 2355,2361.37 2362.07,2354.3 ccw(c2365.61,2357.83) 2369.15,2354.3 2376.92,2362.08 2391.42,2376.57 cw(c2394.96,2373.04) 2398.49,2376.57 2405.56,2369.5 cw(c2402.03,2365.97) 2405.56,2362.43 2394.6,2351.47 ccw(c2398.14,2347.93) 2394.6,2344.4 2429.5,2309.5 2446,2293 2690.73,2293 P4.34@2691.73,2292
DQ14: P2.10 P4.36 | length 1054.5
  Top Layer w8: P2.10@1998.63,2623 2048.63,2573 2274,2573 2297.5,2549.5 2301.04,2545.96 ccw(c2304.57,2549.5) 2308.11,2545.96 2316.83,2554.69 cw(c2320.37,2551.15) 2323.9,2554.69 2330.97,2547.62 cw(c2327.44,2544.08) 2330.97,2540.55 2318.71,2528.29 2307.95,2517.53 ccw(c2311.49,2513.99) 2307.95,2510.46 2315.02,2503.38 ccw(c2318.56,2506.92) 2322.09,2503.38 2332.86,2514.14 2345.12,2526.41 cw(c2348.65,2522.87) 2352.19,2526.41 2359.26,2519.33 cw(c2355.72,2515.8) 2359.26,2512.26 2347,2500 2336.24,2489.24 ccw(c2339.77,2485.71) 2336.24,2482.17 2343.31,2475.1 ccw(c2346.84,2478.64) 2350.38,2475.1 2361.14,2485.86 2373.4,2498.12 cw(c2376.94,2494.59) 2380.47,2498.12 2387.54,2491.05 cw(c2384.01,2487.51) 2387.54,2483.98 2375.28,2471.72 2364.52,2460.96 ccw(c2368.06,2457.42) 2364.52,2453.89 2371.59,2446.82 ccw(c2375.13,2450.35) 2378.66,2446.82 2389.42,2457.58 2401.68,2469.84 cw(c2405.22,2466.3) 2408.76,2469.84 2415.83,2462.77 cw(c2412.29,2459.23) 2415.83,2455.69 2407.1,2446.97 ccw(c2410.64,2443.43) 2407.1,2439.9 2430,2417 2443,2404 2679.73,2404 P4.36@2691.73,2392
DQ15: P2.8 P4.38 | length 1053.5
  Top Layer w8: P2.8@1998.63,2723 2046.63,2675 2159,2675 2164,2675 ccw(c2164,2680) 2169,2680 2169,2704 cw(c2174,2704) 2174,2709 2184,2709 cw(c2184,2704) 2189,2704 2189,2675 2189,2643 ccw(c2194,2643) 2194,2638 2204,2638 ccw(c2204,2643) 2209,2643 2209,2675 2209,2704 cw(c2214,2704) 2214,2709 2224,2709 cw(c2224,2704) 2229,2704 2229,2675 2229,2643 ccw(c2234,2643) 2234,2638 2244,2638 ccw(c2244,2643) 2249,2643 2249,2675 2273,2675 2456,2492 P4.38@2691.73,2492
DQ16: P1.38 P3.20 | length 1054.5
  Top Layer w8: P3.20@3051.57,1592 3102.57,1541 3320,1541 3350,1511 3353.54,1507.46 ccw(c3357.07,1511) 3360.61,1507.46 3364.85,1511.71 cw(c3368.38,1508.17) 3371.92,1511.71 3378.99,1504.64 cw(c3375.46,1501.1) 3378.99,1497.56 3371.21,1489.79 3337.83,1456.41 ccw(c3341.37,1452.87) 3337.83,1449.34 3344.9,1442.26 ccw(c3348.44,1445.8) 3351.97,1442.26 3381.82,1472.11 cw(c3385.36,1468.57) 3388.89,1472.11 3395.96,1465.04 cw(c3392.43,1461.5) 3395.96,1457.97 3366.12,1428.12 ccw(c3369.65,1424.59) 3366.12,1421.05 3373.19,1413.98 ccw(c3376.72,1417.52) 3380.26,1413.98 3410.1,1443.82 cw(c3413.64,1440.29) 3417.18,1443.82 3424.25,1436.75 cw(c3420.71,1433.22) 3424.25,1429.68 3394.4,1399.84 ccw(c3397.94,1396.3) 3394.4,1392.77 3401.47,1385.7 ccw(c3405.01,1389.23) 3408.54,1385.7 3438.39,1415.54 cw(c3441.92,1412) 3445.46,1415.54 3532,1329 P1.38@3638,1223
DQ17: P1.36 P3.19 | length 1054.5
  Top Layer w8: P3.19@3151.57,1592 3344,1592 3397,1539 3400.54,1535.46 ccw(c3404.07,1539) 3407.61,1535.46 3433.21,1561.07 cw(c3436.75,1557.53) 3440.28,1561.07 3447.35,1554 cw(c3443.82,1550.46) 3447.35,1546.93 3418.21,1517.79 3397.07,1496.65 ccw(c3400.61,1493.11) 3397.07,1489.57 3404.14,1482.5 ccw(c3407.68,1486.04) 3411.21,1482.5 3432.36,1503.64 3461.5,1532.79 cw(c3465.03,1529.25) 3468.57,1532.79 3475.64,1525.71 cw(c3472.1,1522.18) 3475.64,1518.64 3446.5,1489.5 3425.36,1468.36 ccw(c3428.89,1464.83) 3425.36,1461.29 3432.43,1454.22 ccw(c3435.96,1457.75) 3439.5,1454.22 3460.64,1475.36 3489.78,1504.5 cw(c3493.32,1500.97) 3496.85,1504.5 3503.92,1497.43 cw(c3500.39,1493.9) 3503.92,1490.36 3474.78,1461.22 3453.64,1440.08 ccw(c3457.18,1436.54) 3453.64,1433.01 3460.71,1425.93 ccw(c3464.25,1429.47) 3467.78,1425.93 3485.39,1443.54 cw(c3488.92,1440) 3492.46,1443.54 3527,1409 3613,1323 P1.36@3638,1323
DQ18: P1.34 P3.24 | length 1054.5
  Top Layer w8: P3.24@3051.57,1792 3103.57,1740 3287,1740 3326.5,1700.5 3330.04,1696.96 ccw(c3333.57,1700.5) 3337.11,1696.96 3343.3,1703.16 cw(c3346.84,1699.62) 3350.37,1703.16 3357.44,1696.09 cw(c3353.91,1692.55) 3357.44,1689.02 3347.71,1679.29 3304.09,1635.66 ccw(c3307.62,1632.12) 3304.09,1628.59 3311.16,1621.52 ccw(c3314.69,1625.05) 3318.23,1621.52 3361.86,1665.14 3371.59,1674.88 cw(c3375.12,1671.34) 3378.66,1674.88 3385.73,1667.8 cw(c3382.19,1664.27) 3385.73,1660.73 3376,1651 3345.95,1620.96 ccw(c3349.49,1617.42) 3345.95,1613.88 3353.02,1606.81 ccw(c3356.56,1610.35) 3360.09,1606.81 3390.14,1636.86 3399.87,1646.59 cw(c3403.41,1643.06) 3406.94,1646.59 3414.01,1639.52 cw(c3410.48,1635.99) 3414.01,1632.45 3407.82,1626.25 ccw(c3411.35,1622.72) 3407.82,1619.18 3425.5,1601.5 3604,1423 P1.34@3638,1423
DQ19: P1.32 P3.23 | length 1054.5
  Top Layer w8: P3.23@3151.57,1792 3286,1792 3305,1773 3316.11,1761.89 ccw(c3319.64,1765.43) 3323.18,1761.89 3340.69,1779.4 cw(c3344.22,1775.86) 3347.76,1779.4 3354.83,1772.33 cw(c3351.3,1768.79) 3354.83,1765.26 3333.79,1744.21 3326.01,1736.43 ccw(c3329.54,1732.9) 3326.01,1729.36 3333.08,1722.29 ccw(c3336.62,1725.83) 3340.15,1722.29 3344.39,1726.54 cw(c3347.93,1723) 3351.46,1726.54 3355,1723 3439,1639 3442.54,1635.46 ccw(c3446.07,1639) 3449.61,1635.46 3471.64,1657.49 cw(c3475.17,1653.96) 3478.71,1657.49 3485.78,1650.42 cw(c3482.24,1646.89) 3485.78,1643.35 3460.21,1617.79 3448.15,1605.72 ccw(c3451.68,1602.18) 3448.15,1598.65 3455.22,1591.58 ccw(c3458.75,1595.11) 3462.29,1591.58 3474.36,1603.64 3499.92,1629.21 cw(c3503.46,1625.68) 3506.99,1629.21 3514.06,1622.14 cw(c3510.53,1618.6) 3514.06,1615.07 3488.5,1589.5 3476.43,1577.44 ccw(c3479.97,1573.9) 3476.43,1570.37 3483.5,1563.29 ccw(c3487.04,1566.83) 3490.57,1563.29 3502.64,1575.36 3534.82,1607.54 cw(c3538.35,1604) 3541.89,1607.54 3548.96,1600.47 cw(c3545.42,1596.93) 3548.96,1593.39 3516.78,1561.22 3504.72,1549.15 ccw(c3508.25,1545.62) 3504.72,1542.08 3511.79,1535.01 ccw(c3515.32,1538.55) 3518.86,1535.01 3527.39,1543.54 cw(c3530.92,1540) 3534.46,1543.54 3535,1543 3555,1523 P1.32@3638,1523
DQ20: P1.30 P3.26 | length 1054.5
  Top Layer w8: P3.26@3051.57,1892 3103.95,1839.63 3316.37,1839.63 3390,1766 3393.54,1762.46 ccw(c3397.07,1766) 3400.61,1762.46 3437.15,1799.01 cw(c3440.69,1795.47) 3444.22,1799.01 3451.29,1791.94 cw(c3447.76,1788.4) 3451.29,1784.87 3411.21,1744.79 3391.53,1725.1 ccw(c3395.06,1721.57) 3391.53,1718.03 3398.6,1710.96 ccw(c3402.14,1714.5) 3405.67,1710.96 3425.36,1730.64 3465.44,1770.73 cw(c3468.97,1767.19) 3472.51,1770.73 3479.58,1763.65 cw(c3476.04,1760.12) 3479.58,1756.58 3439.5,1716.5 3419.81,1696.82 ccw(c3423.35,1693.28) 3419.81,1689.75 3426.88,1682.68 ccw(c3430.42,1686.21) 3433.96,1682.68 3450.1,1698.82 cw(c3453.64,1695.29) 3457.18,1698.82 3482.5,1673.5 3533,1623 P1.30@3638,1623
DQ21: P1.28 P3.25 | length 1054.5
  Top Layer w8: P3.25@3151.57,1892 3323,1892 3333,1892 3348,1892 cw(c3348,1887) 3353,1887 3353,1827 ccw(c3358,1827) 3358,1822 3368,1822 ccw(c3368,1827) 3373,1827 3373,1887 cw(c3378,1887) 3378,1892 3388,1892 cw(c3388,1887) 3393,1887 3393,1827 ccw(c3398,1827) 3398,1822 3408,1822 ccw(c3408,1827) 3413,1827 3413,1887 cw(c3418,1887) 3418,1892 3428,1892 cw(c3428,1887) 3433,1887 3433,1827 ccw(c3438,1827) 3438,1822 3448,1822 ccw(c3448,1827) 3453,1827 3453,1887 cw(c3458,1887) 3458,1892 3469,1892 3476.07,1884.93 ; 3471.5,1889.5 3476.07,1884.93 ; P1.28@3638,1723 3553.5,1807.5 3549.96,1811.04 ccw(c3546.43,1807.5) 3542.89,1811.04 3512.52,1780.66 cw(c3508.98,1784.2) 3505.45,1780.66 3498.38,1787.73 cw(c3501.91,1791.27) 3498.38,1794.8 3528.75,1825.18 ccw(c3525.22,1828.71) 3528.75,1832.25 3517,1844 3476.07,1884.93
DQ22: P1.26 P3.28 | length 1054.5
  Top Layer w8: P3.28@3051.57,1992 3098.57,1945 3251,1945 3256,1945 ccw(c3256,1950) 3261,1950 3261,1969.72 cw(c3266,1969.72) 3266,1974.72 3276,1974.72 cw(c3276,1969.72) 3281,1969.72 3281,1945 3281,1914.28 ccw(c3286,1914.28) 3286,1909.28 3296,1909.28 ccw(c3296,1914.28) 3301,1914.28 3301,1945 3301,1969.72 cw(c3306,1969.72) 3306,1974.72 3316,1974.72 cw(c3316,1969.72) 3321,1969.72 3321,1945 3321,1914.28 ccw(c3326,1914.28) 3326,1909.28 3336,1909.28 ccw(c3336,1914.28) 3341,1914.28 3341,1945 3341,1956 cw(c3346,1956) 3346,1961 3356,1961 cw(c3356,1956) 3361,1956 3361,1945 3361,1914.28 ccw(c3366,1914.28) 3366,1909.28 3376,1909.28 ccw(c3376,1914.28) 3381,1914.28 3381,1940 cw(c3386,1940) 3386,1945 3396,1945 cw(c3396,1940) 3401,1940 3401,1914.28 ccw(c3406,1914.28) 3406,1909.28 3416,1909.28 ccw(c3416,1914.28) 3421,1914.28 3421,1940 cw(c3426,1940) 3426,1945 3496,1945 3516,1945 P1.26@3638,1823
DQ23: P1.24 P3.27 | length 1054.5
  Top Layer w8: P3.27@3151.57,1992 3344,1992 3349,1992 ccw(c3349,1997) 3354,1997 3354,2020.24 cw(c3359,2020.24) 3359,2025.24 3369,2025.24 cw(c3369,2020.24) 3374,2020.24 3374,1992 3374,1965.76 ccw(c3379,1965.76) 3379,1960.76 3389,1960.76 ccw(c3389,1965.76) 3394,1965.76 3394,1992 3394,2020.24 cw(c3399,2020.24) 3399,2025.24 3409,2025.24 cw(c3409,2020.24) 3414,2020.24 3414,1992 3414,1965.76 ccw(c3419,1965.76) 3419,1960.76 3429,1960.76 ccw(c3429,1965.76) 3434,1965.76 3434,1992 3434,2020.24 cw(c3439,2020.24) 3439,2025.24 3449,2025.24 cw(c3449,2020.24) 3454,2020.24 3454,1992 3454,1965.76 ccw(c3459,1965.76) 3459,1960.76 3469,1960.76 ccw(c3469,1965.76) 3474,1965.76 3474,1992 3474,2020.24 cw(c3479,2020.24) 3479,2025.24 3489,2025.24 cw(c3489,2020.24) 3494,2020.24 3494,1992 3494,1965.76 ccw(c3499,1965.76) 3499,1960.76 3509,1960.76 ccw(c3509,1965.76) 3514,1965.76 3514,1992 3514,2020.24 cw(c3519,2020.24) 3519,2025.24 3529,2025.24 cw(c3529,2020.24) 3534,2020.24 3534,1997 ccw(c3539,1997) 3539,1992 3555,1992 3569,1992 P1.24@3638,1923